# Altium PCB 32-178PCB图（源文件格式）.PcbDoc
Units mil, origin at the board's own origin, x right, y up, seen from the top; angles counter-clockwise.
Board outline 5326 x 3823.07 mil, 2 copper layers (Top Layer, Bottom Layer); 11 components, 36 nets, 121 pads, 0 vias.
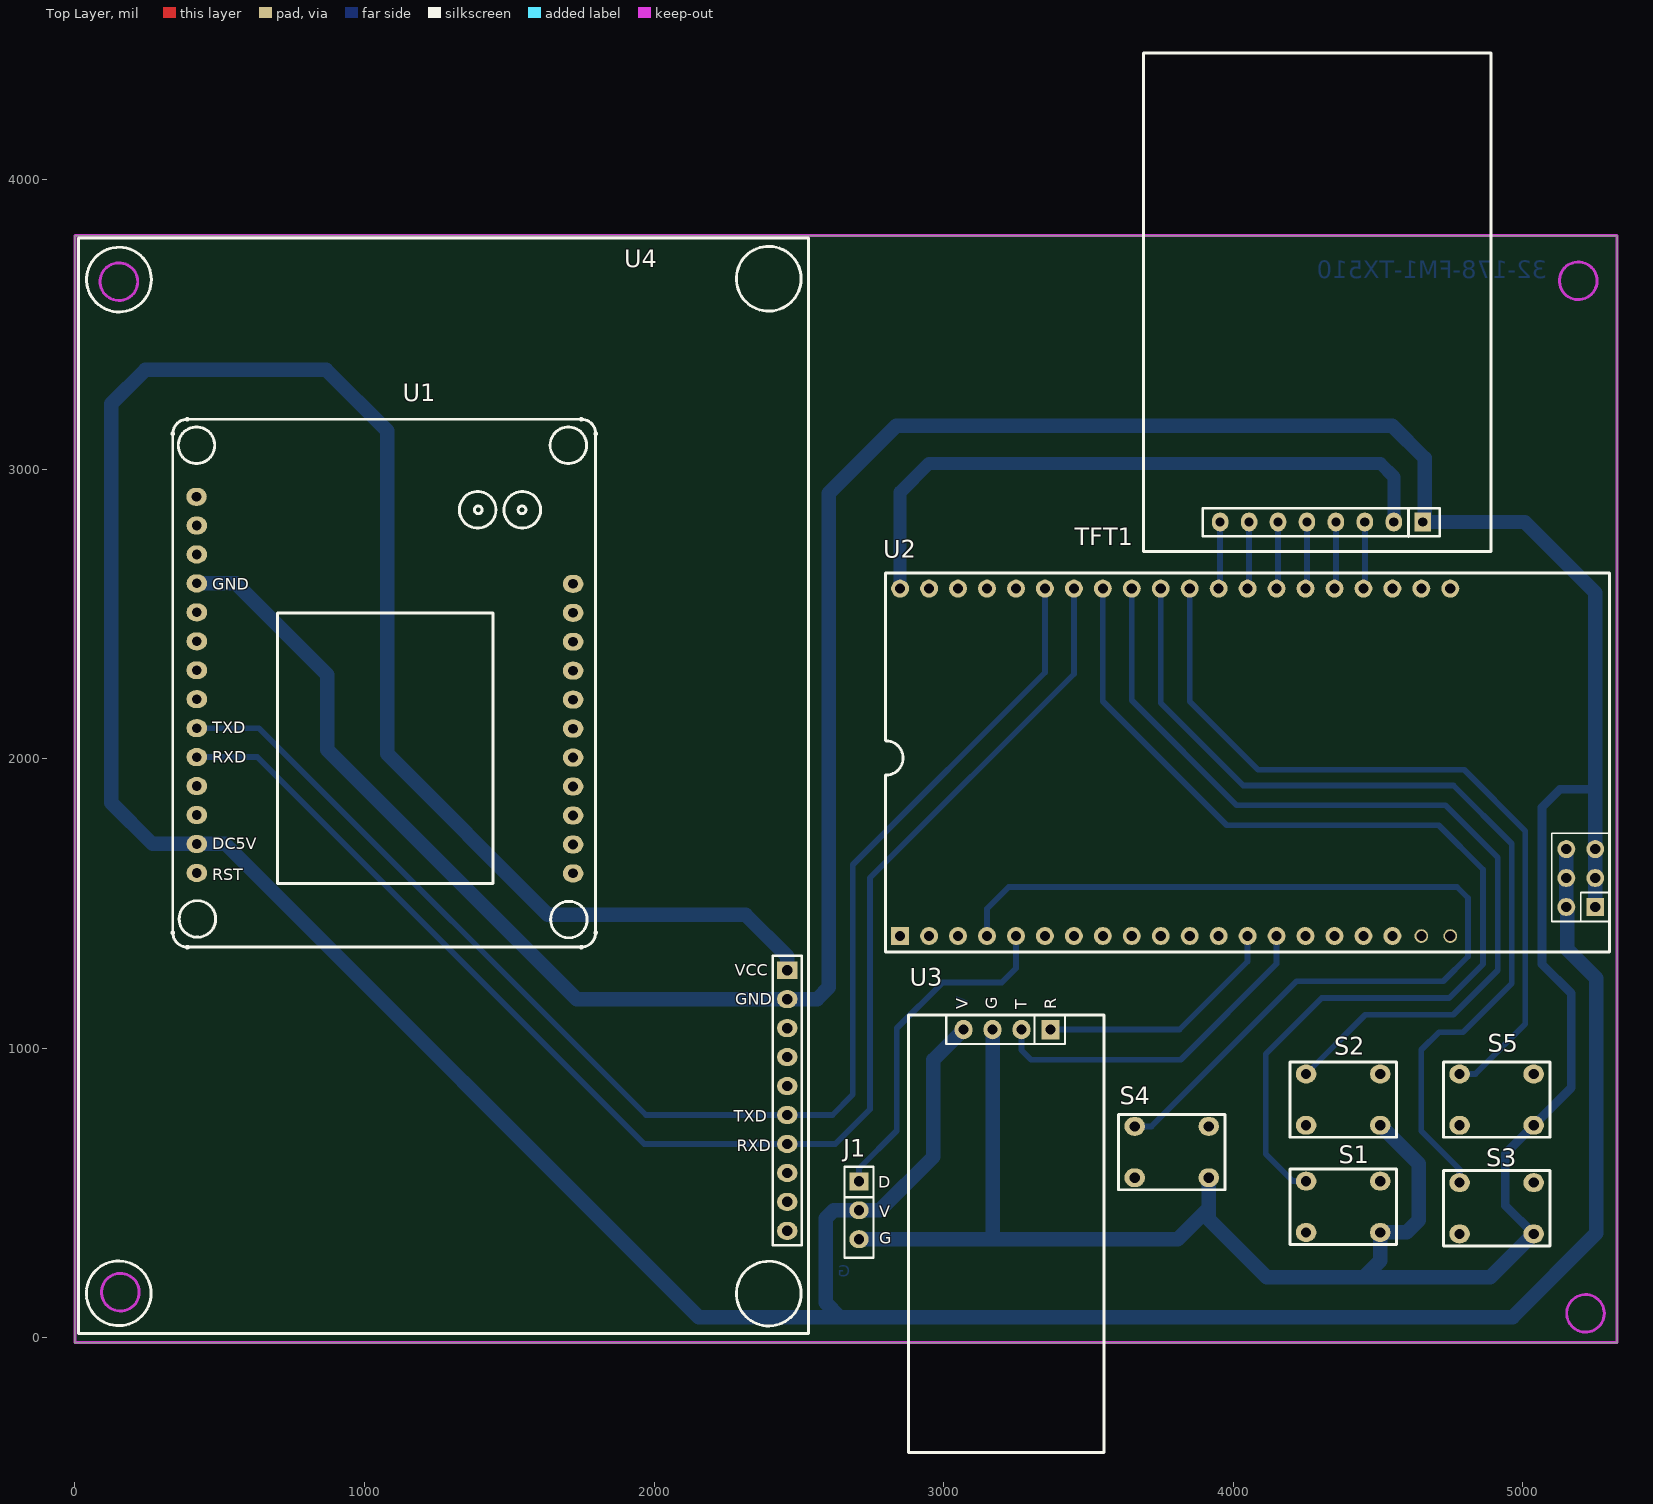
[diagram p0: Top Layer view]
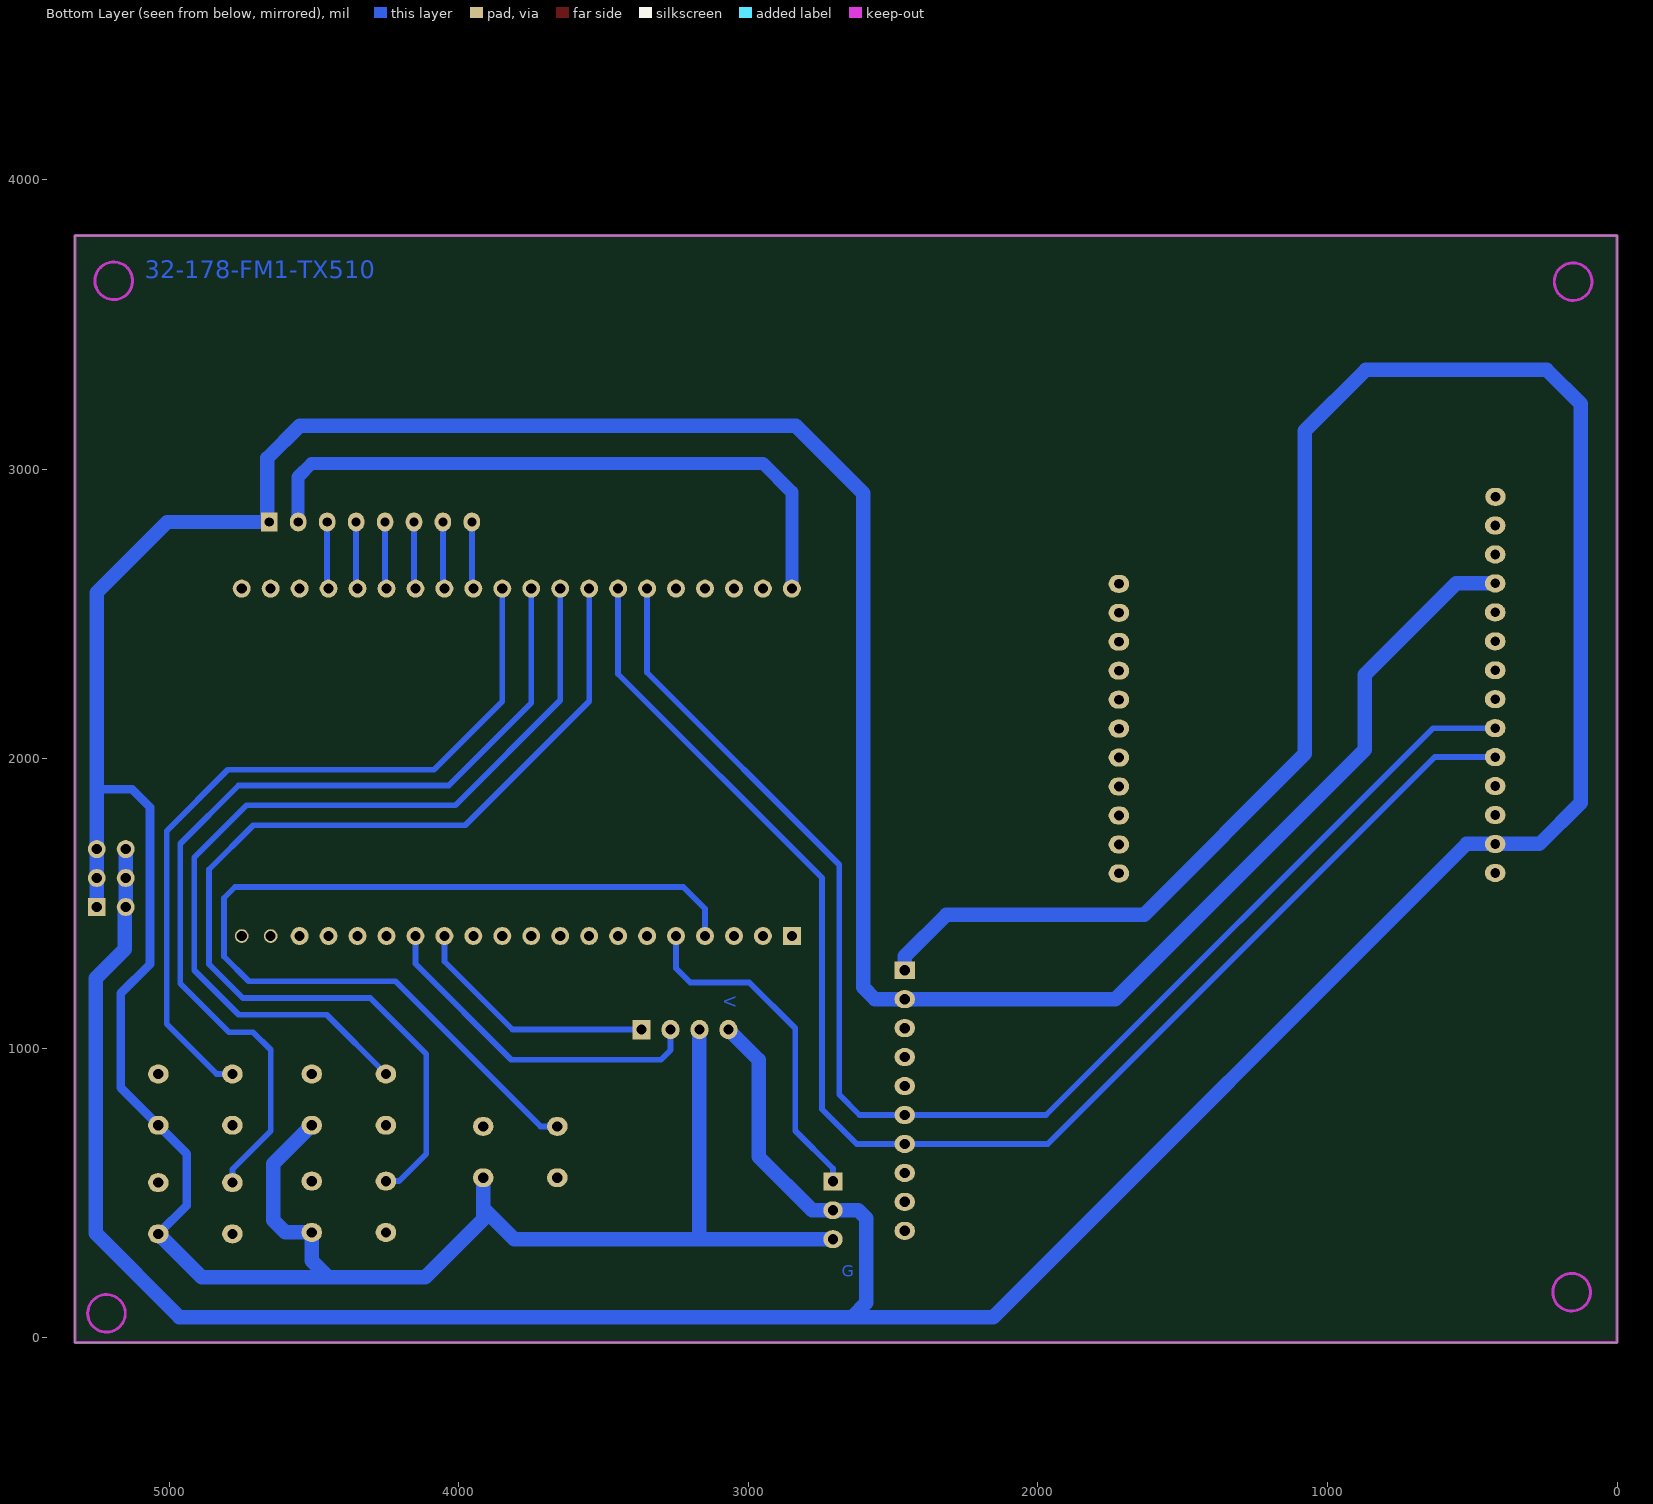
[diagram p1: Bottom Layer view, seen from below]

## Layer stack, top to bottom
Top Solder: solder mask 0.4, Solder Resist, Dk 3.5
Top Layer: signal copper 1.4
Dielectric1: dielectric 12.6, FR-4, Dk 4.8
Bottom Layer: signal copper 1.4
Bottom Solder: solder mask 0.4, Solder Resist, Dk 3.5

## Board outline
0,-17 0,3806.07 5326,3806.07 5326,-17

## Design rules (kind name [scope] priority, off if disabled: settings)
Clearance [All] p1: gap=12
ComponentClearance [All] p1 off: gap=10 collisioncheckmode=3 verticalgap=10 showdistances=FALSE
FabricationTestpoint [(IsPad And (OnTopLayer Or OnBottomLayer))] p1: side=3 testpointundercomponent=TRUE minsize=40 maxsize=100 preferedsize=60 minholesize=0 maxholesize=40 preferedholesize=32 testpointgrid=1 allowsidetop=TRUE allowsidebottom=TRUE usegrid=TRUE gridtolerance=0.01
Height [All] p1 off: minheight=0 maxheight=1000 prefheight=500
HoleSize [All] p1 off: absolutevalues=TRUE maxlimit=100 minlimit=1 maxpercent=80.000 minpercent=20.000
LayerPairs [All] p1 off: enforce=TRUE
PlaneClearance [All] p1 off: clearance=20
PlaneConnect [All] p1 off: planeconnectstyle=Relief reliefexpansion=20 reliefentries=4 reliefconductorwidth=10 reliefairgap=10
PolygonConnect [All] p1 off: connectstyle=Relief reliefconductorwidth=10 reliefentries=4 polygonreliefangle="90 Angle" airgapwidth=10
RoutingVias [All] p1: holewidth=15 width=30 viastyle="Through Hole" minholewidth=15 minwidth=25 maxholewidth=50 maxwidth=100
SilkToSolderMaskClearance SilkscreenOverComponentPads [IsPad] p1: minsilkscreentomaskgap=10 clearancetoexposedcopper=TRUE
SolderMaskExpansion [All] p1: expansion=4
Width [All] p1: maxlimit=100 minlimit=12 preferedwidth=20
22 further rules are at their usual default settings.

## Components (designator, comment, footprint, x,y, rotation, side; value= is the part's Value field where it differs from the comment)
J1 "舵机" 舵机接口 2708,540 r0 top
S1 "Button" BUTTON_6x6DIP 4380,452 r180 top
S2 "Button" BUTTON_6x6DIP 4380,822 r180 top
S3 "Button" BUTTON_6x6DIP 4910,447 r180 top
S4 "Button" BUTTON_6x6DIP 3788,641 r180 top
S5 "Button" BUTTON_6x6DIP 4910,822 r180 top
TFT1 "TFT-1.44" TFT-1.44 4655,2817 r180 top
U1 "K210人脸识别_MF1" K210_MF1 421,2805 r0 top locked
U2 "STM32_CORE" STM32_CORE 2850,1387 r90 top
U3 "无线接口" 蓝牙MODE平放 3369,1064 r90 top
U4 "TX510-人脸识别" TX510 2460,1269 r0 top locked

## Footprints (in the part's own frame and the unit in brackets; to place one, negate y for a bottom-side part, rotate by r counter-clockwise, add the part's x,y. Pads: shape width x height; smd on the part's side, far side on the other; paste and mask are expansions set on the pad)
BUTTON_6x6DIP [mm]
  oval 1.8x1.65 hole 0.9: 1(-3.25,2.25) 2(3.25,-2.25) ""(-3.25,-2.25) ""(3.25,2.25)
  round 1 on Top Overlay: 3(0,0)
  silkscreen extent -4.67,-3.3 4.67,3.3
K210_MF1 [mm]
  oval 1.8x1.575 hole 0.85: 0(-0.025,2.515) 1(0,0) 2(0,-2.54) 3(0,-5.08) 4(0,-7.62) 5(0,-10.16) 6(0,-12.7) 7(0,-15.24) 8(0,-17.78) 9(0,-20.32) 10(0,-22.86) 11(0,-25.4) 12(0,-27.94) 13(0,-30.48) 14(33.005,-30.521) 15(33.005,-27.981) 16(33.005,-25.441) 17(33.005,-22.901) 18(33.005,-20.361) 19(33.005,-17.821) 20(33.005,-15.281) 21(33.005,-12.741) 22(33.005,-10.201) 23(33.005,-7.661) 24(33.005,-5.121)
  silkscreen extent -2.19,-37.06 35.07,9.39
STM32_CORE [mil]
  rect 62x62 hole 35: 1(0,0) 41(100.4,-2400.6)
  round 62 hole 35: 2(0,-100) 3(0,-200) 4(0,-300) 5(0,-400) 6(0,-500) 7(0,-600) 8(0,-700) 9(0,-800) 10(0,-900) 11(0,-1000) 12(0,-1100) 13(0,-1200) 14(0,-1300) 15(0,-1400) 16(0,-1500) 17(0,-1600) 18(0,-1700) 21(1200,-1900) 22(1200,-1800) 23(1200,-1700) 24(1200,-1600) 25(1200,-1500) 26(1200,-1400) 27(1200,-1300) 28(1200,-1200) 29(1200,-1100) 30(1200,-1000) 31(1200,-900) 32(1200,-800) 33(1200,-700) 34(1200,-600) 35(1200,-500) 36(1200,-400) 37(1200,-300) 38(1200,-200) 39(1200,-100) 40(1200,0) 42(100.4,-2300.6) 43(200.4,-2400.6) 44(200.4,-2300.6) 45(300.4,-2400.6) 46(300.4,-2300.6)
  round 47.24 hole 35: 19(0,-1800) 20(0,-1900)
  silkscreen extent -55,-2451 1253,50, body extent -76,-2658 1276,69, height 1004
TFT-1.44 [mm]
  rect 1.45x1.65 hole 0.813: 1(0,0)
  oval 1.45x1.65 hole 0.813: 2(2.54,0) 3(5.08,0) 4(7.62,0) 5(10.16,0) 6(12.7,0) 7(15.24,0) 8(17.78,0)
  silkscreen extent -5.97,-41.15 24.51,2.58
TX510 [mm]
  rect 1.8x1.57 hole 0.9: 1(0,0)
  oval 1.8x1.57 hole 0.9: 2(0,-2.54) 3(0,-5.08) 4(0,-7.62) 5(0,-10.16) 6(0,-12.7) 7(0,-15.24) 8(0,-17.78) 9(0,-20.32) 10(0,-22.86)
  silkscreen extent -62.18,-31.85 1.85,64.24
舵机接口 [mil]
  rect 66.93x62 hole 35: 1(0,0)
  oval 66.93x62 hole 35: 2(0,-100) 3(0,-200)
  silkscreen extent -50,-264 50,50
蓝牙MODE平放 [mil]
  rect 66.93x62 hole 35: 1(0,0)
  oval 66.93x62 hole 35: 2(0,100) 3(0,200) 4(0,300)
  silkscreen extent -1460,-185 50,490

## Part data
J1: library part CON3, "接线端子3芯"
S1 S2 S3 S4 S5: "按键"
U2: "STM32核心板"
U3: library part 蓝牙MODE, "蓝牙模块"

## Nets (pads, with @x,y where several pads share a name; then routed paths per layer and width w, separated by ;. In a path a pad name is that pad's centre, name@x,y a point inside that pad or via, vN(x,y) a via of type N, cw(c..) or ccw(c..) an arc to the next point about the centre after c; other vN are vias at no path point)
GND: J1.3 S1.1 S2.1 S3.1 S4.1 S5.1 TFT1.1 U1.3 U2.41 U2.43 U2.45 U3.3 U4.2 | length 14812.9
  Bottom Layer w30: S3.1 4940,456.37 4940,635.47 S5.1 5168,863.47 5168,1189 5067,1290 5067,1832 5129,1894 5250.6,1894
  Bottom Layer w50: U1.3 556,2605 872,2289 872,2030 1733,1169 U4.2 2563,1169 2604,1210 2604,2916 2837,3149 4550,3149 4661,3038 4661,2823 TFT1.1 5007,2817 5250.6,2573.4 5250.6,1894 U2.45 U2.43 U2.41 ; J1.3 3808.95,340 3915.95,447 ; 3169,343 U3.3 ; S4.1 3915.95,447 ; S2.1 4641,600.37 4641,405 4599.42,363.42 S1.1 4507.95,265.95 4451,209 ; S3.1 4888.53,209 4451,209 ; 3915.95,447 3915.95,409.05 4116,209 4451,209
PA0: S4.2 U2.4 | length 3397.7
  Bottom Layer w20: U2.4 3150,1481 3225,1556 4773,1556 4811,1518 4811,1316 4726,1231 4219,1231 3717.58,729.58 S4.2
PA1: J1.1 U2.5 | length 1191
  Bottom Layer w20: J1.1 2708,584 2838.5,714.5 2838.5,1068.5 2997,1227 3201,1227 3250,1276 U2.5
PA2: U2.6
PA3: U2.7
PA4: U2.8
PA5: U2.9
PA6: U2.10
PA7: U2.11
PA8: U2.12
PA9: U2.13 U3.1 | length 866.3
  Bottom Layer w20: U3.1 3815,1064 4050,1299 U2.13
PA10: U2.14 U3.2 | length 1198.8
  Bottom Layer w20: U3.2 3269,993 3302,960 3819,960 4150,1291 U2.14
PA11: U2.15
PA12: U2.16
PA15: U2.17
PB0: TFT1.3 U2.24 | length 232.1
  Bottom Layer w20: U2.24 4455,2592 TFT1.3
PB1: TFT1.4 U2.25 | length 232.1
  Bottom Layer w20: U2.25 4355,2592 TFT1.4
PB2: TFT1.5 U2.26 | length 232.1
  Bottom Layer w20: U2.26 4255,2592 TFT1.5
PB3: TFT1.6 U2.27 | length 232.1
  Bottom Layer w20: U2.27 4155,2592 TFT1.6
PB4: TFT1.7 U2.28 | length 232.1
  Bottom Layer w20: U2.28 4055,2592 TFT1.7
PB5: TFT1.8 U2.29 | length 232.1
  Bottom Layer w20: U2.29 3955,2592 TFT1.8
PB6: S5.2 U2.30 | length 2699.5
  Bottom Layer w20: U2.30 3850,2197 4086,1961 4798,1961 5009,1750 5009,1083 4836.58,910.58 S5.2
PB7: S3.2 U2.31 | length 3211.3
  Bottom Layer w20: U2.31 3750,2192 4035,1907 4761,1907 4962,1706 4962,1223 4794,1055 4711,1055 4650,994 4650,714 4782.05,581.95 S3.2
PB8: S2.2 U2.32 | length 3074.3
  Bottom Layer w20: U2.32 3650,2201 4012,1839 4733,1839 4914,1658 4914,1269 4760,1115 4456.47,1115 S2.2
PB9: S1.2 U2.33 | length 3671.8
  Bottom Layer w20: U2.33 3550,2198 3978,1770 4710,1770 4863,1617 4863,1290 4746,1173 4306,1173 4113,980 4113,634 4206.42,540.58 S1.2
PB10: U1.9 U2.34 U4.7 | length 5017.7
  Bottom Layer w20: U1.9 630,2005 1966,669 U4.7 2626,669 2746,789 2746,1588 3450,2292 U2.34
PB11: U1.8 U2.35 U4.6 | length 4870.4
  Bottom Layer w20: U1.8 636,2105 1972,769 U4.6 2616,769 2686.5,839.5 2686.5,1633.5 3350,2297 U2.35
PB12: U2.36
PB13: U2.37
PB14: U2.38
PB15: U2.39
PC13: U2.1
PC14: U2.2
PC15: U2.3
VCC_3.3V: TFT1.2 U2.40 | length 2254.1
  Bottom Layer w45: U2.40 2850,2920 2949,3019 4509,3019 4555,2973 TFT1.2
VCC_5V: J1.2 U1.12 U2.42 U2.44 U2.46 U3.4 U4.1 | length 13960.6
  Bottom Layer w50: U4.1 2460,1317 2316,1461 1633,1461 1078,2016 1078,3132 868,3342 243,3342 126,3225 126,1847 268,1705 U1.12 520,1705 2154,71 2642,71 ; U3.4 2964,959 2964,624 2780,440 J1.2 2621,440 2593,412 2593,120 2642,71 ; U2.46 U2.44 U2.42 5154,1487.4 5154,1342 5254.5,1241.5 5254.5,360.5 4965,71 2642,71
pads on no net: S1. S1.3 S2. S2.3 S3. S3.3 S4. S4.3 S5. S5.3 U1.0 U1.1 U1.2 U1.4 U1.5 U1.6 U1.7 U1.10 U1.11 U1.13 U1.14 U1.15 U1.16 U1.17 U1.18 U1.19 U1.20 U1.21 U1.22 U1.23 U1.24 U2.18 U2.19 U2.20 U2.21 U2.22 U2.23 U4.3 U4.4 U4.5 U4.8 U4.9 U4.10

## Keep-outs
Keep-Out Layer:
  circle w10: c5192,3650 r64.96
  circle w10: c5217,84 r64.96
  circle w10: c152,3647 r64.96
  circle w10: c157,157 r64.96
  lines w10: 0,-17 5326,-17 5326,3806.07 0,3806.07 0,-17

## Other copper
Bottom Layer:
  text "32-178-FM1-TX510" at 5084,3659 h60

## Text inside footprints (layer, text, board x,y; h text height)
J1: Top Overlay "G" at 2778,325 h40; Top Overlay "V" at 2777,416 h40; Top Overlay "D" at 2775,518 h40; Bottom Layer "G" at 2677,211 h40
U1: Top Overlay "RST" at 475,1579 h40; Top Overlay "DC5V" at 475,1686 h40; Top Overlay "TXD" at 475,2087 h40; Top Overlay "RXD" at 475,1986 h40; Top Overlay "GND" at 475,2583 h40
U3: Top Overlay "V" at 3084,1134 h40 r90; Top Overlay "R" at 3389,1134 h40 r90; Top Overlay "G" at 3185.67,1134 h40 r90; Top Overlay "T" at 3287.33,1134 h40 r90; Bottom Layer "V" at 3084,1179 h40 r90
U4: Top Overlay "TXD" at 2276,745 h40; Top Overlay "RXD" at 2286,644 h40; Top Overlay "GND" at 2281,1150 h40; Top Overlay "VCC" at 2279,1250 h40